# EAGLE board 206_uv (EAGLE 7.6.0)
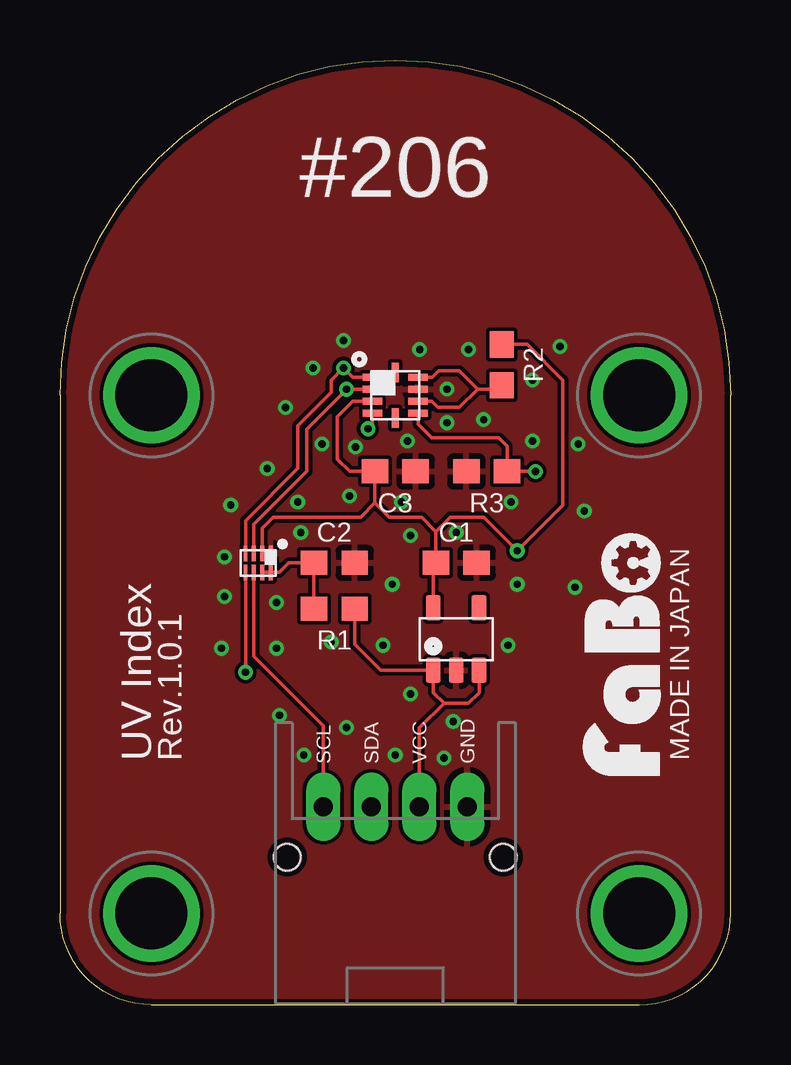
[diagram p0: board, top side]
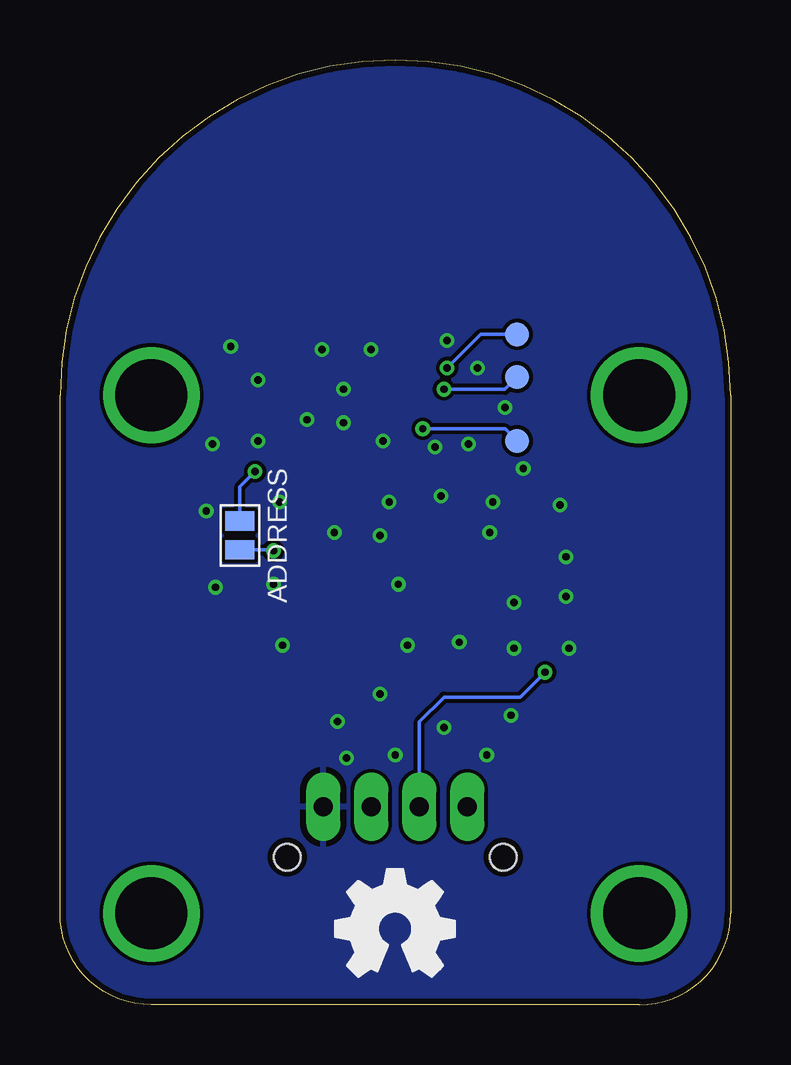
[diagram p1: board, bottom side, seen from below]

Size 27.94 x 39.37 mm. Coordinates in mm from the lower left corner, seen from the top.
Copper layers (1*16): Top 0.035mm / dielectric 1.5mm / Bottom 0.035mm
Design rules "SeeedStudio_2layer_DRU_no_angle_20140221": minimum track width 6mil, minimum drill 12mil, track to track 6mil, track to pad 6mil, pad to pad 6mil, via to via 6mil, smd to smd 0mil, copper to edge 10mil, drill to drill 10mil, minimum pad ring 10mil, minimum via ring 6mil, stop-mask expansion 2mil, vias tented up to drill 100mil, thermal gap 10mil

## Footprints (pad centres in the part's own frame; a part is rotated, then mirrored left to right if it is on the bottom)
0603 = smd 1.1 x 1: 1 -0.85,0; 2 0.85,0
SOT-23-5 = smd 0.6 x 1.05: 1 -0.95,-1.3; 2 0,-1.3; 3 0.95,-1.3; 4 0.95,1.3; 5 -0.95,1.3
X2SON = smd 0.2 x 0.65: 1 -0.525,-0.395; 2 -0.175,-0.395; 3 0.175,-0.395; 4 0.525,-0.395; 5 0.525,0.395; 6 0.175,0.395; 7 -0.175,0.395; 8 -0.525,0.395
SILICONLABS-SI1133 = smd 0.8 x 0.3: 1 -0.95,0.75; 2 -0.95,0.25; 3 -0.95,-0.25; 4 -0.95,-0.75; 6 0.95,-0.75; 7 0.95,-0.25; 8 0.95,0.25; 9 0.95,0.75 | smd 0.3 x 0.8: 5 0,-0.95; 10 0,0.95
FABO_BRICK_I2C = drill 0.8 pad 1.422 long: GND 3,-10.795; SCL -3,-10.795; SDA -1,-10.795; VCC 1,-10.795 | drill 3 pad 3.81: P$1 -10.16,6.35; P$2 10.16,6.35; P$3 -10.16,-15.24; P$4 10.16,-15.24 | hole 1.1: -4.5,-12.895; 4.5,-12.895
SMD-JUMPER-2-OPEN = smd 0.8 x 1.2: 1 -0.6,0; 2 0.6,0
TP-10 = smd 1 x 1: 1 0,0

## Placement (x,y rotation side)
C1  1uF  [0603]  16.51,18.41 180 top
C2  0.1uF  [0603]  11.43,18.41 180 top
C3  0.1uF  [0603]  13.97,22.23 180 top
IC1  [SOT-23-5]  16.51,15.24 0 top
IC2  [X2SON]  8.26,18.41 180 top
IC3  [SILICONLABS-SI1133]  13.97,25.4 0 top
J1  [FABO_BRICK_I2C]  13.97,19.05 0 top
R1  200k  [0603]  11.43,16.51 0 top
R2  10k  [0603]  18.41,26.67 90 top
R3  10k  [0603]  17.78,22.23 0 top
SJ1  OPEN  [SMD-JUMPER-2-OPEN]  20.45,19.56 90 bottom
TP1  [TP-10]  8.89,27.94 0 bottom
TP2  [TP-10]  8.89,26.16 0 bottom
TP3  [TP-10]  8.89,23.5 0 bottom
U$2  [LOGO_FABO_MS]  25.4,14.61 90 top
U$3  [LOGO_OSHW_M_BOTTOM]  13.97,3.17 0 top

## Library data of the parts
C1-C3 = FaBo-Capacitor
IC1 SJ1 TP1-TP3 = FaBo-Supply
IC2 = FaBo-LevelTranslator
IC3 = FaBo-Mems
J1 = FaBo-Template
R1-R3 = FaBo-Resistors
U$2 U$3 = FaBo-etc

## Nets
3V3: C1.2 C3.2 IC1.5 IC2.2 IC3.3 R2.2 SJ1.1
5V: IC1.1 IC1.3 J1.VCC R1.2
ADDRESS: IC3.6 R3.2 SJ1.2
GND: C1.1 C2.1 C3.1 IC1.2 IC2.1 IC3.8 J1.GND R3.1
N$1: C2.2 IC2.7 IC2.8 R1.1
N$4: IC3.7 IC3.9 R2.1
N$6: IC3.4 TP3.1
SCL: IC2.3 IC3.2 TP2.1
SCL_HV: IC2.6 J1.SCL
SDA: IC2.4 IC3.1 TP1.1
SDA_HV: IC2.5 J1.SDA

## Tracks (layer width: path | path; a pad name or v marks a point on that pad's centre or on a via)
3V3  (via drill 0.3)
  Top 0.152: 13.12,20.92 C3.2 12.06,22.23 11.56,22.73 11.56,24.51 12.2,25.15 IC3.3 | IC2.2 8.43,19.86 8.89,20.32 12.52,20.32 13.12,20.92 | R2.2 19.47,27.52 20.95,26.04 20.95,20.83 19.09,18.96 | 19.09,18.96 v19.05,18.92 | 19.09,18.96 19.02,18.96 17.65,20.32 16.26,20.32 15.66,19.72 | 15.66,19.72 C1.2 15.56,18.32 IC1.5 | 15.66,19.72 15.06,20.32 13.72,20.32 13.12,20.92
  Bottom 0.152: SJ1.1 19.09,18.96 v19.05,18.92
5V
  Top 0.152: 16,12.57 15.56,13.02 IC1.1 13.37,13.94 12.28,15.03 R1.2 | 16,12.57 17.02,12.57 17.46,13.02 IC1.3 | J1.VCC 14.97,11.54 16,12.57
ADDRESS  (via drill 0.3)
  Top 0.152: IC3.6 14.92,24.2 15.49,23.62 18.29,23.62 18.63,23.28 R3.2 v19.81,22.23
  Bottom 0.152: SJ1.2 20.45,21.59 v19.81,22.23
GND  (via drill 0.3)
  other vias: 16.13,25.65 16.13,24.26 18.8,20.95 14.22,20.95 16.51,19.68 14.61,19.56 12.32,23.24 19.68,23.5 19.68,26.04 21.59,23.37 21.84,20.57 19.05,17.53 20.83,27.43 17.02,27.3 17.65,24.38 14.99,27.3 9.91,20.95 10.92,23.37 12.06,21.21 14.48,23.5 11.81,27.69 10.54,26.54 9.4,24.89 8.64,22.35 10.03,19.68 13.84,17.53 13.46,14.99 11.3,15.11 14.61,12.95 16.38,11.81 18.67,14.99 21.46,17.4 7.11,20.83 6.86,18.67 9.02,14.86 9.02,16.76 11.94,11.56 13.97,10.41 16,10.29 10.16,10.41 9.14,12.06 6.73,14.86 6.86,17.02
  pour Bottom: 0,0 27.94,0 27.94,39.37 0,39.37
  pour Top: 0,0 27.94,0 27.94,39.37 0,39.37
N$1
  Top 0.152: R1.1 C2.2 9.53,18.41 9.13,18.02 IC2.8 IC2.7
N$4
  Top 0.152: IC3.9 15.51,26.15 15.77,26.42 16.64,26.42 17.4,25.65 | 17.4,25.65 16.64,24.89 15.75,24.89 15.49,25.15 IC3.7 | 17.4,25.65 18.25,25.65 R2.1
N$6  (via drill 0.3)
  Top 0.152: IC3.4 13.02,24.2 v12.83,24
  Bottom 0.152: TP3.1 9.4,24 v12.83,24
SCL  (via drill 0.3)
  Top 0.152: IC3.2 v11.94,25.65 10.29,24 10.29,22.23 8.08,20.02 IC2.3
  Bottom 0.152: TP2.1 9.4,25.65 v11.94,25.65
SCL_HV
  Top 0.152: IC2.6 8.08,14.53 10.97,11.64 J1.SCL
SDA  (via drill 0.3)
  Top 0.152: IC2.4 7.73,20.18 9.91,22.35 9.91,24.13 11.3,25.53 11.3,26.04 v11.81,26.54 12.2,26.15 IC3.1
  Bottom 0.152: TP1.1 10.41,27.94 v11.81,26.54
SDA_HV  (via drill 0.3)
  Top 0.152: IC2.5 v7.73,13.86
  Bottom 0.152: J1.SDA 12.97,11.79 11.94,12.83 8.76,12.83 v7.73,13.86

## Text on the board
tPlace: #206 | MADE IN JAPAN | UV Index | Rev.1.0.1
bPlace: ADDRESS